# EAGLE board Sample (EAGLE 9.6.2)
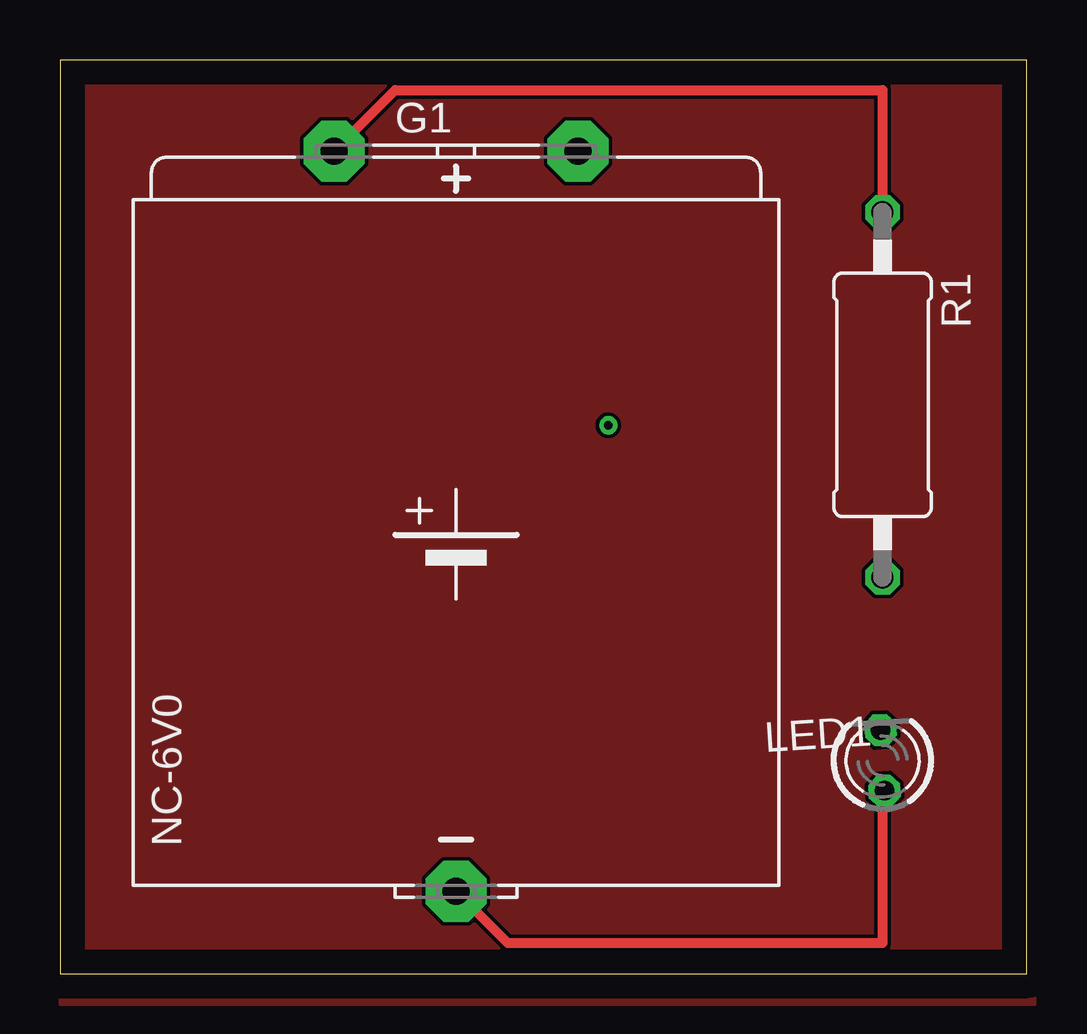
[diagram p0: board, top side]
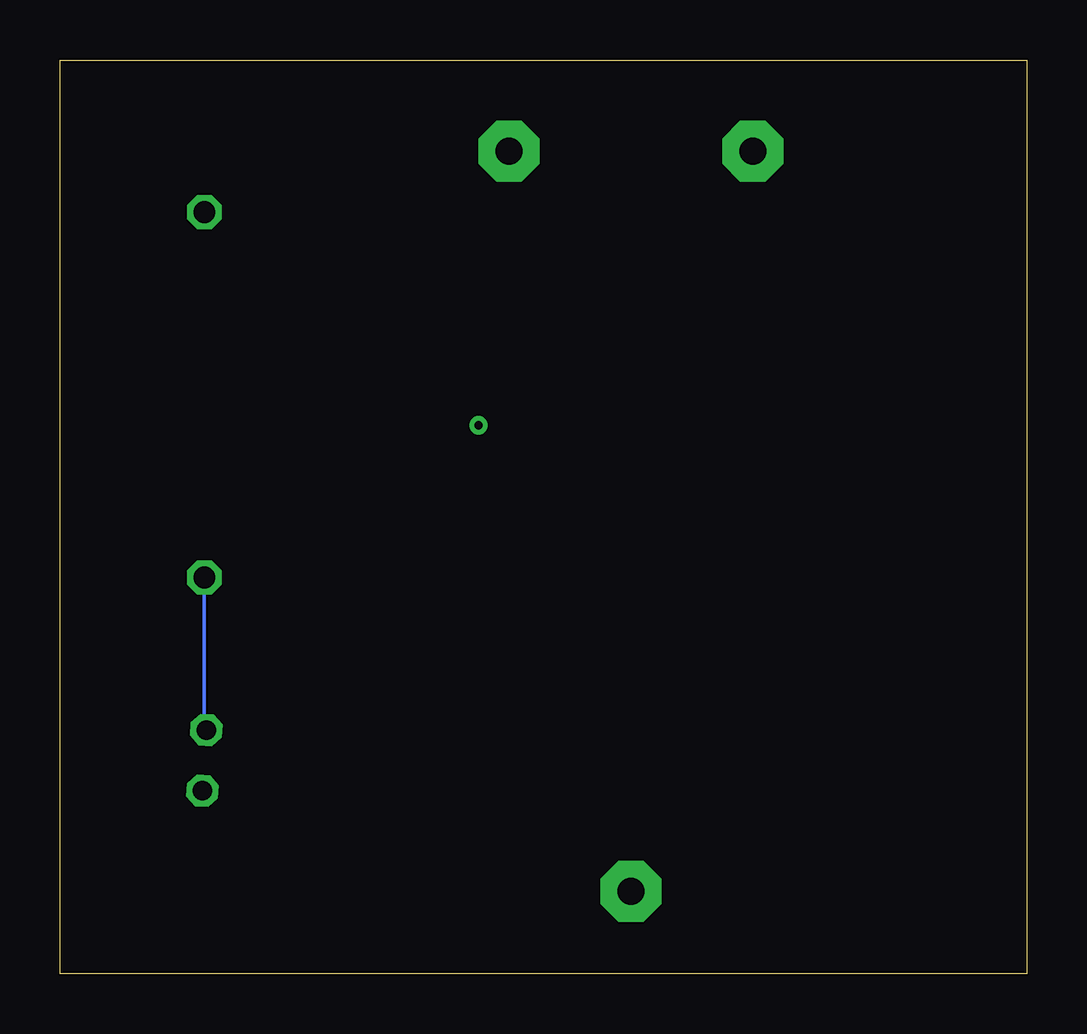
[diagram p1: board, bottom side, seen from below]

Size 40.31 x 38.09 mm. Coordinates in mm from the lower left corner, seen from the top.
Outline: 0,0 40.31,0 40.31,38.09 0,38.09 0,0
Copper layers (1*16): Top 0.035mm / dielectric 1.5mm / Bottom 0.035mm
Design rules "default": minimum track width 6mil, minimum drill 0.35mm, track to track 6mil, track to pad 6mil, pad to pad 6mil, via to via 6mil, smd to smd 6mil, copper to edge 40mil, drill to drill 6mil, minimum pad ring 10mil, minimum via ring 8mil, stop-mask expansion 4mil, vias tented up to drill 0mil, thermal gap 10mil

## Footprints (pad centres in the part's own frame; a part is rotated, then mirrored left to right if it is on the bottom)
5V110R = drill 1.118 pad 2.54 octagon: + -15.24,-5.08; +@1 -15.24,5.08; - 15.621,0
LED3MM = drill 0.813 octagon: A -1.27,0; K 1.27,0
0411/15 = drill 0.914 octagon: 1 -7.62,0; 2 7.62,0

## Placement (x,y rotation side)
G1  5V110R  [5V110R]  16.51,19.05 270 top
LED1  Yellow  [LED3MM]  34.29,8.89 93.6 top
R1  330 ohm  [0411/15]  34.29,24.13 270 top

## Library data of the parts
G1 = battery
LED1 = led
R1 = rcl; SPICEPREFIX: R

## Nets
N$1: G1.+ R1.1
N$2: LED1.K R1.2
N$3: G1.- LED1.A

## Tracks (layer width: path | path; a pad name or v marks a point on that pad's centre or on a via)
GND
  pour Top: 0,38.1 40.64,38.1 40.64,-1.27 0,-1.27
N$1
  Top 0.406: G1.+ 13.97,36.83 34.29,36.83 R1.1
N$2
  Bottom 0.152: R1.2 34.29,10.24 LED1.K
N$3
  Top 0.406: LED1.A 34.29,7.54 34.29,1.27 18.67,1.27 G1.-
N$4  (via drill 0.35)
  other vias: 22.86,22.86